# EAGLE board BOARD_e_BOOK_READER__VERSIUNE_10 v44 (EAGLE 9.7.0)
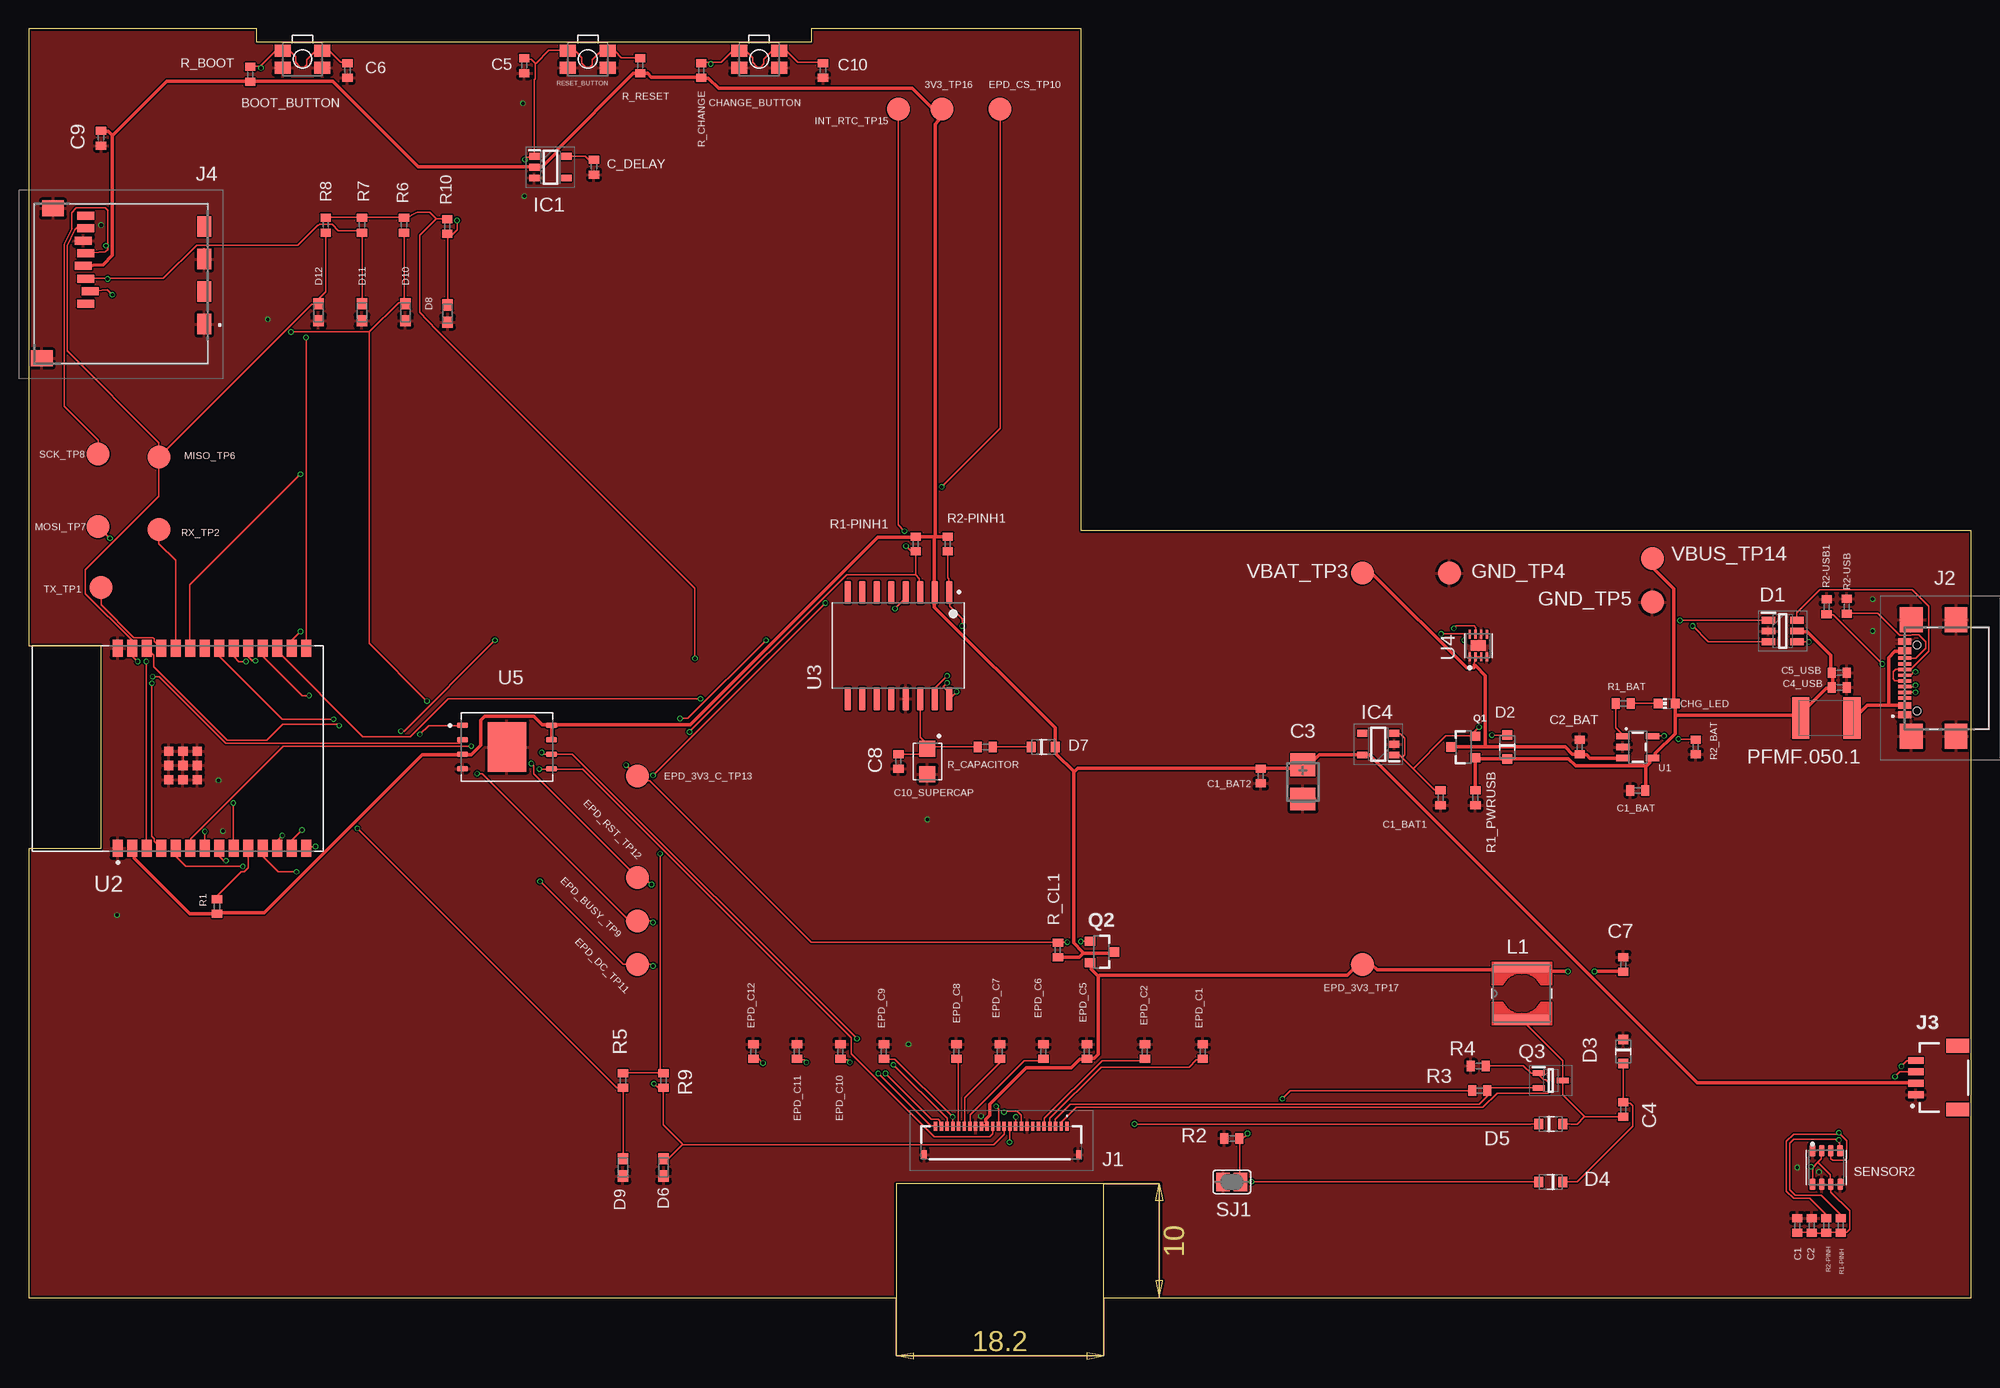
[diagram p0: board, top side]
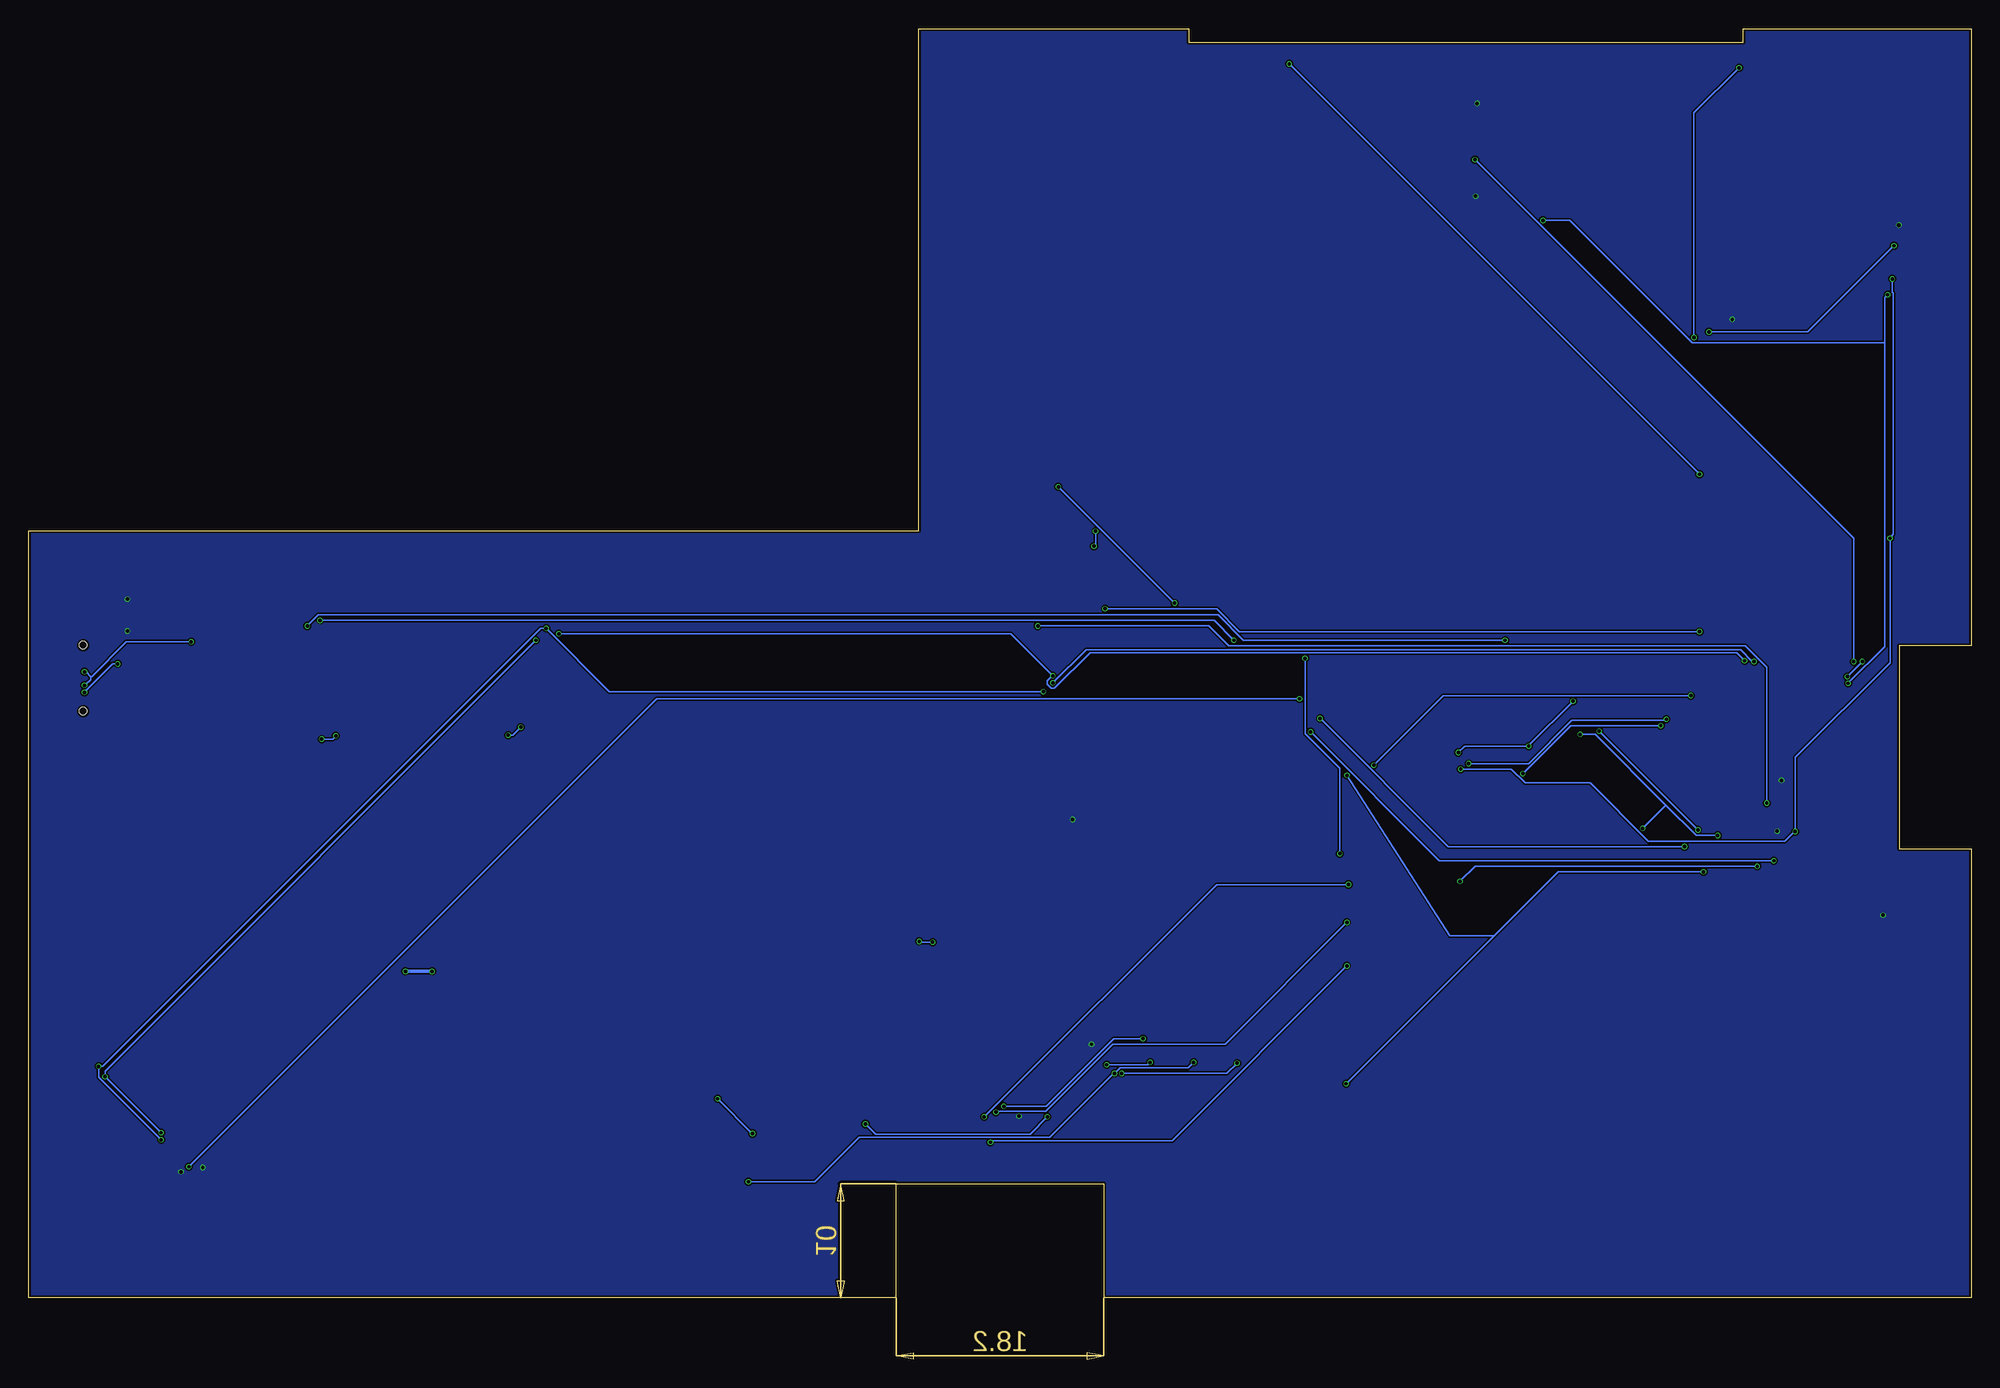
[diagram p1: board, bottom side, seen from below]

Size 170.2 x 111.2 mm. Coordinates in mm from the lower left corner, seen from the top.
Outline: 0,0 76,0 76,10 94.2,10 94.2,0 170.2,0 170.2,67.2 92.2,67.2 92.2,111.2 68.58,111.2 68.58,110 20,110 20,111.2 0,111.2 0,57.15 6.34,57.15 6.34,39.37 0,39.37 0,0
Copper layers (1*16): Top 0.035mm / dielectric 1.6mm / Bottom 0.035mm
Design rules "jlcpcb-2layers.dru": minimum track width 0.15mm, minimum drill 0.3mm, track to track 5mil, track to pad 5mil, pad to pad 5mil, via to via 5mil, smd to smd 5mil, copper to edge 0.2mm, drill to drill 5mil, minimum pad ring 10mil, minimum via ring 3mil, stop-mask expansion 4mil, vias tented up to drill 0mil, thermal gap 10mil
Net classes: 1 Trasee alimentare: width 0.3 mm

## Footprints (pad centres in the part's own frame; a part is rotated, then mirrored left to right if it is on the bottom)
TP20R = smd 2 x 2: TP 0,0
MYBUTTON = smd 1.4 x 1.05: 1 1.75,0.75; 2 -1.75,0.75; 3 -1.75,-0.75; 4 1.75,-0.75
ESP32_WROVER_EAGLE-LTSPICE_C0402 = smd 0.7 x 0.9: 1 -0.65,0; 2 0.65,0
RCL_CT3528 = smd 2 x 2.2: + -1.5,0; - 1.5,0
CAPCP3225X100N = smd 1.4 x 1.4: 1 -1.1,0; 2 1.1,0
ADAFRUIT_CHIP-LED0603 = smd 0.8 x 0.8: A 0,-0.75; C 0,0.75
SOT95P280X145-6N = smd 1.2 x 0.6: 1 -1.25,0.95; 2 -1.25,0; 3 -1.25,-0.95; 4 1.25,-0.95; 5 1.25,0; 6 1.25,0.95
ESP32_WROVER_AVX---SD0805S020S1R0_AVX_SD0805S020S1R0_0 = smd 0.8 x 0.9: 1 -1.05,0; 2 1.05,0
DIOC1608X36N = smd 0.97 x 0.94: 1 -0.75,0; 2 0.75,0
SOT95P280X125-5N = smd 0.9 x 0.6: 1 -1.4,0.95; 2 -1.4,0; 3 -1.4,-0.95; 4 1.4,-0.95; 5 1.4,0.95
SOT95P280X120-5N = smd 0.9 x 0.6: 1 -1.4,0.95; 2 -1.4,0; 3 -1.4,-0.95; 4 1.4,-0.95; 5 1.4,0.95
FH34SRJ24S05SH99 = smd 0.3 x 0.8: 1 5.75,1.45; 2 5.25,1.45; 3 4.75,1.45; 4 4.25,1.45; 5 3.75,1.45; 6 3.25,1.45; 7 2.75,1.45; 8 2.25,1.45; 9 1.75,1.45; 10 1.25,1.45; 11 0.75,1.45; 12 0.25,1.45; 13 -0.25,1.45; 14 -0.75,1.45; 15 -1.25,1.45; 16 -1.75,1.45; 17 -2.25,1.45; 18 -2.75,1.45; 19 -3.25,1.45; 20 -3.75,1.45; 21 -4.25,1.45; 22 -4.75,1.45; 23 -5.25,1.45; 24 -5.75,1.45 | smd 0.4 x 0.8: MP1 6.75,-1.05; MP2 -6.75,-1.05
SAMACSYS_PARTS_USB4110GFA = smd 0.3 x 1.15: A1 -3.35,3.678; A4 -2.55,3.678; A5 -1.25,3.678; A6 -0.25,3.678; A7 0.25,3.678; A8 1.25,3.678; A9 2.55,3.678; A12 3.35,3.678; B1 3.05,3.678; B4 2.25,3.678; B5 1.75,3.678; B6 0.75,3.678; B7 -0.75,3.678; B8 -1.75,3.678; B9 -2.25,3.678; B12 -3.05,3.678 | smd 2.18 x 2: MP1 -5.11,-0.827; MP2 5.11,-0.827; MP3 -5.11,3.103; MP4 5.11,3.103 | hole 0.65: -2.89,2.603; 2.89,2.603
JST04_1MM_RA = smd 0.6 x 1.35: 1 -1.5,0; 2 -0.5,0; 3 0.5,0; 4 1.5,0 | smd 1.2 x 2: NC1 2.8,-3.675; NC2 -2.8,-3.675
112ATAARR03ATTEND = smd 1.8 x 1.2: G1 10.6,10.4; G2 4.9,10.4; S1 7.75,10.4; S2 2.05,10.4 | smd 1.4 x 1.9: G3 13.6,-3.85; G4 0.45,-2.85 | smd 0.7 x 1.5: P1 8.8,0; P2 7.7,0.4; P3 6.6,0; P4 5.5,-0.2; P5 4.4,0; P6 3.3,-0.2; P7 2.2,0; P8 1.1,0
IND_4828-WE-TPC_WRE = smd 0.889 x 4.826: 1 -4.826,-2.54; 2 -0.254,-2.54
ESP32C6_VARISTOR_CT/CN1812 = smd 1.5 x 3.6: 1 -2.25,0; 2 2.25,0
ESP32_WROVER_SPARKFUN-DISCRETESEMI_SOT23-3 = smd 0.8 x 0.9: 1 -0.95,-1; 2 0.95,-1; 3 0,1.1
SOT65P210X110-3N = smd 1.05 x 0.5: 1 -1.05,0.65; 2 -1.05,-0.65; 3 1.05,0
ESP32_WROVER_EAGLE-LTSPICE_R0402 = smd 0.7 x 0.9: 1 -0.65,0; 2 0.65,0
ESP32_WROVER_BME680_PSON80P300X300X100-8N = smd 1.016 x 0.5: 1 1.458,1.2; 2 1.458,0.4; 3 1.458,-0.4; 4 1.458,-1.2; 5 -1.458,-1.22; 6 -1.458,-0.4; 7 -1.458,0.4; 8 -1.458,1.2
SJ = smd 1.168 x 1.6: 1 -0.762,0; 2 0.762,0
ESP32_WROVER_SPARKFUN-IC-POWER_SOT23-5 = smd 0.55 x 1.2: 1 -0.95,-1.3; 2 0,-1.3; 3 0.95,-1.3; 4 0.95,1.3; 5 -0.95,1.3
XCVR_ESP32-C6-WROOM-1-N8 = smd 1.5 x 0.9: 1 -8.75,5.26; 2 -8.75,3.99; 3 -8.75,2.72; 4 -8.75,1.45; 5 -8.75,0.18; 6 -8.75,-1.09; 7 -8.75,-2.36; 8 -8.75,-3.63; 9 -8.75,-4.9; 10 -8.75,-6.17; 11 -8.75,-7.44; 12 -8.75,-8.71; 13 -8.75,-9.98; 14 -8.75,-11.25; 15 8.75,-11.25; 16 8.75,-9.98; 17 8.75,-8.71; 18 8.75,-7.44; 19 8.75,-6.17; 20 8.75,-4.9; 21 8.75,-3.63; 22 8.75,-2.36; 23 8.75,-1.09; 24 8.75,0.18; 25 8.75,1.45; 26 8.75,2.72; 27 8.75,3.99; 28 8.75,5.26 | smd 0.8 x 0.8: 29_1 -2.755,0.79; 29_2 -1.505,0.79; 29_3 -0.255,0.79; 29_4 -2.755,-0.46; 29_5 -1.505,-0.46; 29_6 -0.255,-0.46; 29_7 -2.755,-1.71; 29_8 -1.505,-1.71; 29_9 -0.255,-1.71
SOIC127P1032X265-16N = smd 2.05 x 0.59: 1 -4.655,4.445; 2 -4.655,3.175; 3 -4.655,1.905; 4 -4.655,0.635; 5 -4.655,-0.635; 6 -4.655,-1.905; 7 -4.655,-3.175; 8 -4.655,-4.445; 9 4.655,-4.445; 10 4.655,-3.175; 11 4.655,-1.905; 12 4.655,-0.635; 13 4.655,0.635; 14 4.655,1.905; 15 4.655,3.175; 16 4.655,4.445
SON50P200X200X80-9N = smd 0.76 x 0.27: 1 -0.985,0.75; 2 -0.985,0.25; 3 -0.985,-0.25; 4 -0.985,-0.75; 5 0.985,-0.75; 6 0.985,-0.25; 7 0.985,0.25; 8 0.985,0.75 | smd 0.9 x 1.3: 9 0,0
SON127P600X800X80-9N = smd 0.94 x 0.44: 1 -3.895,1.905; 2 -3.895,0.635; 3 -3.895,-0.635; 4 -3.895,-1.905; 5 3.895,-1.905; 6 3.895,-0.635; 7 3.895,0.635; 8 3.895,1.905 | smd 3.4 x 4.3: 9 0,0

## Placement (x,y rotation side)
3V3_TP16  TPTP20R  [TP20R]  80.01,104.14 0 top
BOOT_BUTTON  BUTTON_CUSYOMV1  [MYBUTTON]  24,108.53 180 top
C1  100nF  [ESP32_WROVER_EAGLE-LTSPICE_C0402]  154.94,6.35 90 top
C1_BAT  4.7uF  [ESP32_WROVER_EAGLE-LTSPICE_C0402]  140.97,44.45 180 top
C1_BAT1  4.7uF  [ESP32_WROVER_EAGLE-LTSPICE_C0402]  123.7,43.81 270 top
C1_BAT2  4.7uF  [ESP32_WROVER_EAGLE-LTSPICE_C0402]  107.95,45.72 270 top
C2  100nF  [ESP32_WROVER_EAGLE-LTSPICE_C0402]  156.21,6.35 90 top
C2_BAT  4.7uF  [ESP32_WROVER_EAGLE-LTSPICE_C0402]  135.89,48.26 90 top
C3  100uF  [RCL_CT3528]  111.63,45.21 270 top
C4  4.7uF/25V  [ESP32_WROVER_EAGLE-LTSPICE_C0402]  139.7,16.51 270 top
C4_USB  100nF  [ESP32_WROVER_EAGLE-LTSPICE_C0402]  158.62,53.48 0 top
C5  1uF  [ESP32_WROVER_EAGLE-LTSPICE_C0402]  43.43,107.95 270 top
C5_USB  4.7uF  [ESP32_WROVER_EAGLE-LTSPICE_C0402]  158.62,54.76 0 top
C6  100nF  [ESP32_WROVER_EAGLE-LTSPICE_C0402]  27.94,107.53 270 top
C7  10uF  [ESP32_WROVER_EAGLE-LTSPICE_C0402]  139.7,29.21 90 top
C8  100nF  [ESP32_WROVER_EAGLE-LTSPICE_C0402]  76.2,46.99 270 top
C9  100nF  [ESP32_WROVER_EAGLE-LTSPICE_C0402]  6.35,101.6 270 top
C10  100nF  [ESP32_WROVER_EAGLE-LTSPICE_C0402]  69.6,107.53 270 top
C10_SUPERCAP  CPH3225A  [CAPCP3225X100N]  78.74,46.99 270 top
C_DELAY  100nF  [ESP32_WROVER_EAGLE-LTSPICE_C0402]  49.53,99.06 270 top
CHANGE_BUTTON  BUTTON_CUSYOMV1  [MYBUTTON]  64,108.53 180 top
CHG_LED  [ADAFRUIT_CHIP-LED0603]  143.51,52.07 90 top
D1  USBLC6-2SC6Y  [SOT95P280X145-6N]  153.67,58.42 0 top
D2  ESP32_WROVER_AVX---SD0805S020S1R0_AVX_SD0805S020S1R0_0_0AVX_SD0805S020S1R0_0_0  [ESP32_WROVER_AVX---SD0805S020S1R0_AVX_SD0805S020S1R0_0]  129.54,48.26 270 top
D3  MBR0530  [ESP32_WROVER_AVX---SD0805S020S1R0_AVX_SD0805S020S1R0_0]  139.7,21.59 270 top
D4  MBR0530  [ESP32_WROVER_AVX---SD0805S020S1R0_AVX_SD0805S020S1R0_0]  133.35,10.16 180 top
D5  MBR0530  [ESP32_WROVER_AVX---SD0805S020S1R0_AVX_SD0805S020S1R0_0]  133.35,15.24 0 top
D6  PGB1010603MR  [DIOC1608X36N]  55.63,11.43 90 top
D7  ESP32_WROVER_AVX---SD0805S020S1R0_AVX_SD0805S020S1R0_0_0AVX_SD0805S020S1R0_0_0  [ESP32_WROVER_AVX---SD0805S020S1R0_AVX_SD0805S020S1R0_0]  88.9,48.26 0 top
D8  PGB1010603MR  [DIOC1608X36N]  36.7,86.23 90 top
D9  PGB1010603MR  [DIOC1608X36N]  52.07,11.43 90 top
D10  PGB1010603MR  [DIOC1608X36N]  33.02,86.36 90 top
D11  PGB1010603MR  [DIOC1608X36N]  29.21,86.36 90 top
D12  PGB1010603MR  [DIOC1608X36N]  25.4,86.36 90 top
EPD_3V3_C_TP13  TPTP20R  [TP20R]  53.34,45.72 0 top
EPD_3V3_TP17  TPTP20R  [TP20R]  116.84,29.21 0 top
EPD_BUSY_TP9  TPTP20R  [TP20R]  53.34,33.02 0 top
EPD_C1  1uF/50V  [ESP32_WROVER_EAGLE-LTSPICE_C0402]  102.87,21.59 90 top
EPD_C2  1uF/50V  [ESP32_WROVER_EAGLE-LTSPICE_C0402]  97.79,21.59 90 top
EPD_C5  0.1uF/50V  [ESP32_WROVER_EAGLE-LTSPICE_C0402]  92.71,21.59 90 top
EPD_C6  1uF/50V  [ESP32_WROVER_EAGLE-LTSPICE_C0402]  88.9,21.59 90 top
EPD_C7  1uF/50V  [ESP32_WROVER_EAGLE-LTSPICE_C0402]  85.09,21.59 90 top
EPD_C8  1uF/50V  [ESP32_WROVER_EAGLE-LTSPICE_C0402]  81.28,21.59 90 top
EPD_C9  1uF/50V  [ESP32_WROVER_EAGLE-LTSPICE_C0402]  74.93,21.59 90 top
EPD_C10  1uF/50V  [ESP32_WROVER_EAGLE-LTSPICE_C0402]  71.12,21.59 90 top
EPD_C11  1uF/50V  [ESP32_WROVER_EAGLE-LTSPICE_C0402]  67.31,21.59 90 top
EPD_C12  1uF/50V  [ESP32_WROVER_EAGLE-LTSPICE_C0402]  63.5,21.59 90 top
EPD_CS_TP10  TPTP20R  [TP20R]  85.09,104.14 0 top
EPD_DC_TP11  TPTP20R  [TP20R]  53.34,29.21 0 top
EPD_RST_TP12  TPTP20R  [TP20R]  53.34,36.83 0 top
GND_TP4  TPTP20R  [TP20R]  124.46,63.5 0 top
GND_TP5  TPTP20R  [TP20R]  142.24,60.96 0 top
IC1  BD5229G-TR  [SOT95P280X125-5N]  45.72,99.06 0 top
IC4  XC6220A331MR-G  [SOT95P280X120-5N]  118.24,48.51 180 top
INT_RTC_TP15  TPTP20R  [TP20R]  76.2,104.14 0 top
J1  FH34SRJ-24S-0.5SH_99_  [FH34SRJ24S05SH99]  85.22,13.59 0 top
J2  SAMACSYS_PARTS_USB4110-GF-A  [SAMACSYS_PARTS_USB4110GFA]  168.02,54.3 90 top
J3  QWIIC_RIGHT_ANGLE  [JST04_1MM_RA]  165.32,19.3 90 top
J4  112A-TAAR-R03_ATTEND  [112ATAARR03ATTEND]  5,95.9 270 top
L1  68uH  [IND_4828-WE-TPC_WRE]  128.27,29.21 90 top
MISO_TP6  TPTP20R  [TP20R]  11.43,73.66 0 top
MOSI_TP7  TPTP20R  [TP20R]  6.1,67.56 0 top
PFMF.050.1  ESP32C6_VARISTORCN1812  [ESP32C6_VARISTOR_CT/CN1812]  157.48,50.8 180 top
Q1  20V/4.2A/52mΩ/1.4W  [ESP32_WROVER_SPARKFUN-DISCRETESEMI_SOT23-3]  125.73,48.26 90 top
Q2  20V/4.2A/52mΩ/1.4W  [ESP32_WROVER_SPARKFUN-DISCRETESEMI_SOT23-3]  93.98,30.31 270 top
Q3  SI1308EDL-T1-GE3  [SOT65P210X110-3N]  133.35,19.05 0 top
R1  10K  [ESP32_WROVER_EAGLE-LTSPICE_R0402]  16.51,34.29 90 top
R1-PINH  10K  [ESP32_WROVER_EAGLE-LTSPICE_R0402]  157.48,6.35 270 top
R1-PINH1  10K  [ESP32_WROVER_EAGLE-LTSPICE_R0402]  77.72,66.04 90 top
R1_BAT  200  [ESP32_WROVER_EAGLE-LTSPICE_R0402]  139.7,52.07 0 top
R1_PWRUSB  100K  [ESP32_WROVER_EAGLE-LTSPICE_R0402]  126.75,43.81 90 top
R2  2.2  [ESP32_WROVER_EAGLE-LTSPICE_R0402]  105.41,13.97 0 top
R2-PINH  10K  [ESP32_WROVER_EAGLE-LTSPICE_R0402]  158.75,6.35 270 top
R2-PINH1  10K  [ESP32_WROVER_EAGLE-LTSPICE_R0402]  80.52,66.04 90 top
R2-USB  5K1  [ESP32_WROVER_EAGLE-LTSPICE_R0402]  159.27,60.58 90 top
R2-USB1  5k1  [ESP32_WROVER_EAGLE-LTSPICE_R0402]  157.51,60.55 269.8 top
R2_BAT  2K  [ESP32_WROVER_EAGLE-LTSPICE_R0402]  146.05,48.26 90 top
R3  0.47  [ESP32_WROVER_EAGLE-LTSPICE_R0402]  127.13,18.16 180 top
R4  10K  [ESP32_WROVER_EAGLE-LTSPICE_R0402]  127,20.32 180 top
R5  10K  [ESP32_WROVER_EAGLE-LTSPICE_R0402]  52.07,19.05 90 top
R6  10K  [ESP32_WROVER_EAGLE-LTSPICE_R0402]  32.89,93.98 90 top
R7  10K  [ESP32_WROVER_EAGLE-LTSPICE_R0402]  29.21,93.98 90 top
R8  10K  [ESP32_WROVER_EAGLE-LTSPICE_R0402]  26.04,93.98 90 top
R9  10K  [ESP32_WROVER_EAGLE-LTSPICE_R0402]  55.63,19.05 90 top
R10  10K  [ESP32_WROVER_EAGLE-LTSPICE_R0402]  36.69,93.85 90 top
R_BOOT  10K  [ESP32_WROVER_EAGLE-LTSPICE_R0402]  19.43,107.19 90 top
R_CAPACITOR  15  [ESP32_WROVER_EAGLE-LTSPICE_R0402]  83.82,48.26 180 top
R_CHANGE  10K  [ESP32_WROVER_EAGLE-LTSPICE_R0402]  58.93,107.53 90 top
R_CL1  10k  [ESP32_WROVER_EAGLE-LTSPICE_R0402]  90.17,30.48 90 top
R_RESET  10K  [ESP32_WROVER_EAGLE-LTSPICE_R0402]  53.59,107.95 90 top
RESET_BUTTON  BUTTON_CUSYOMV1  [MYBUTTON]  49,108.53 180 top
RX_TP2  TPTP20R  [TP20R]  11.43,67.31 0 top
SCK_TP8  TPTP20R  [TP20R]  6.1,73.91 0 top
SENSOR2  ESP32_WROVER_BME680_BME680  [ESP32_WROVER_BME680_PSON80P300X300X100-8N]  157.48,11.43 90 top
SJ1  [SJ]  105.41,10.16 0 top
TX_TP1  TPTP20R  [TP20R]  6.35,62.23 0 top
U1  ESP32_WROVER_SPARKFUN-IC-POWER_MCP73831  [ESP32_WROVER_SPARKFUN-IC-POWER_SOT23-5]  140.97,48.26 270 top
U2  ESP32-C6-WROOM-1-N8  [XCVR_ESP32-C6-WROOM-1-N8]  13.07,48.15 90 top
U3  DS3231SN#  [SOIC127P1032X265-16N]  76.2,57.15 270 top
U4  MAX17048G+T10  [SON50P200X200X80-9N]  127,57.15 90 top
U5  W25Q512JVEIQ  [SON127P600X800X80-9N]  41.91,48.26 0 top
VBAT_TP3  TPTP20R  [TP20R]  116.84,63.5 0 top
VBUS_TP14  TPTP20R  [TP20R]  142.24,64.77 0 top

## Library data of the parts
3V3_TP16 BOOT_BUTTON CHANGE_BUTTON CHG_LED EPD_3V3_C_TP13 EPD_3V3_TP17 EPD_BUSY_TP9 EPD_CS_TP10 EPD_DC_TP11 EPD_RST_TP12 GND_TP4 GND_TP5 INT_RTC_TP15 MISO_TP6 MOSI_TP7 PFMF.050.1 RESET_BUTTON RX_TP2 SCK_TP8 SJ1 TX_TP1 VBAT_TP3 VBUS_TP14 = DeskAssistant v19 v1
C1 C1_BAT C1_BAT1 C1_BAT2 C2 C2_BAT C4 C4_USB C5 C5_USB C6-C10 C_DELAY EPD_C1 EPD_C2 EPD_C5-EPD_C12 = DeskAssistant v19 v1; SPICEMODEL: NONE; SPICEPREFIX: C
C3 = DeskAssistant v19 v1; SPICEPREFIX: C
C10_SUPERCAP = DeskAssistant v19 v1; AVAILABILITY: Not in stock; CHECK_PRICES: https://www.snapeda.com/parts/CPH3225A/Seiko+Instruments/view-part/?ref=eda; DESCRIPTION: 11 mF (EDLC) Supercapacitor 3.3 V 1210 (3225 Metric) - -; MF: Seiko Instruments; MP: CPH3225A; PACKAGE: 1210 Seiko; PRICE: None; PURCHASE-URL: https://www.snapeda.com/api/url_track_click_mouser/?unipart_id=562593&manufacturer=Seiko Instruments&part_name=CPH3225A&search_term=None; SNAPEDA_LINK: https://www.snapeda.com/parts/CPH3225A/Seiko+Instruments/view-part/?ref=snap
D1 = DeskAssistant v19 v1; AVAILABILITY: In Stock; CHECK_PRICES: https://www.snapeda.com/parts/USBLC6-2SC6Y/STMicroelectronics/view-part/?ref=eda; DESCRIPTION: 17V Clamp 5A (8/20µs) Ipp Tvs Diode Surface Mount SOT-23-6; MF: STMicroelectronics; MP: USBLC6-2SC6Y; PACKAGE: SOT-23-6 STMicroelectronics; PRICE: None; SNAPEDA_LINK: https://www.snapeda.com/parts/USBLC6-2SC6Y/STMicroelectronics/view-part/?ref=snap
D2 D7 = DeskAssistant v19 v1; CENTROID_NOT_SPECIFIED: No; DATASHEET: http://datasheets.avx.com/schottky.pdf; DIGIKEY_DESCRIPTION: DIODE SCHOTTKY 20V 1A 0805; DIGIKEY_PART_NUMBER: 478-7800-1-ND; LEAD_FREE: yes; MF: AVX; MOUSER_PART_NUMBER: 581-SD0805S020S1R0; PACKAGE: 0805 (2012 metric); PREFIX: D; ROHS: yes; TEMPERATURE_RANGE_HIGH: +125°C; TEMPERATURE_RANGE_LOW: -55°C
D3-D5 = DeskAssistant v19 v1; AVAILABILITY: In Stock; CHECK_PRICES: https://www.snapeda.com/parts/MBR0530/Onsemi/view-part/?ref=eda; DESCRIPTION: Diode Schottky 30 V 500mA Surface Mount SOD-123; MF: ON Semiconductor; MP: MBR0530; PACKAGE: SOD-123-2 ON Semiconductor; PRICE: None; PURCHASE-URL: https://www.snapeda.com/api/url_track_click_mouser/?unipart_id=179458&manufacturer=ON Semiconductor&part_name=MBR0530&search_term=None; SNAPEDA_LINK: https://www.snapeda.com/parts/MBR0530/Onsemi/view-part/?ref=snap
D6 D8-D12 = DeskAssistant v19 v1; AVAILABILITY: In Stock; CHECK_PRICES: https://www.snapeda.com/parts/PGB1010603MR/Littelfuse/view-part/?ref=eda; DESCRIPTION: 150V (Typ) Clamp - Ipp Tvs Diode Surface Mount 0603 (1608 Metric); MF: Littelfuse Inc.; MP: PGB1010603MR; PACKAGE: 0603 Littelfuse Inc.; PRICE: None; PURCHASE-URL: https://www.snapeda.com/api/url_track_click_mouser/?unipart_id=5659453&manufacturer=Littelfuse Inc.&part_name=PGB1010603MR&search_term=None; SNAPEDA_LINK: https://www.snapeda.com/parts/PGB1010603MR/Littelfuse/view-part/?ref=snap
IC1 = DeskAssistant v19 v1; DESCRIPTION: Voltage Detector with Adjustable Delay Time: CMOS processes are utilized to develop high precision, low current consumption CMOS reset ICs that allow arbitrary setting of the delay time. The extensive lineup includes both Nch Open Drain and CMOS output types in a wide range of detection voltages (from 2.3V to 6.0V, in 0.1V steps), enabling selection of the ideal solution based on customer requirements. In addition, the entire series is of course both lead-free and RoHS-compliant.; HEIGHT: 1.25mm; MANUFACTURER_NAME: ROHM Semiconductor; MANUFACTURER_PART_NUMBER: BD5229G-TR; MOUSER_PART_NUMBER: 755-BD5229G-TR; MOUSER_PRICE-STOCK: https://www.mouser.co.uk/ProductDetail/ROHM-Semiconductor/BD5229G-TR?qs=4kLU8WoGk0vvnhrrYwdszw%3D%3D
IC4 = DeskAssistant v19 v1; DESCRIPTION: LDO Voltage Regulators; HEIGHT: 1.2mm; MANUFACTURER_NAME: Torex; MANUFACTURER_PART_NUMBER: XC6220A331MR-G; MOUSER_PART_NUMBER: 865-XC6220A331MR-G; MOUSER_PRICE-STOCK: https://www.mouser.co.uk/ProductDetail/Torex-Semiconductor/XC6220A331MR-G?qs=AsjdqWjXhJ8ZSWznL1J0gg%3D%3D
J1 = DeskAssistant v19 v1; DESCRIPTION: 24 Position FFC, FPC Connector Contacts, Top and Bottom 0.020" (0.50mm) Surface Mount, Right Angle; HEIGHT: 1.1mm; MANUFACTURER_NAME: Hirose; MANUFACTURER_PART_NUMBER: FH34SRJ-24S-0.5SH(99); MOUSER_PART_NUMBER: 798-FH34SRJ24S05SH99; MOUSER_PRICE-STOCK: https://www.mouser.co.uk/ProductDetail/Hirose-Connector/FH34SRJ-24S-0.5SH99?qs=vcbW%252B4%252BSTIpKBl5ap9J8Fw%3D%3D
J2 = DeskAssistant v19 v1; DESCRIPTION: CONN USB 2.0 TYPE-C R/A SMT; HEIGHT: 3.26mm; MANUFACTURER_NAME: GCT (GLOBAL CONNECTOR TECHNOLOGY); MANUFACTURER_PART_NUMBER: USB4110-GF-A; MOUSER_PART_NUMBER: 640-USB4110-GF-A; MOUSER_PRICE-STOCK: https://www.mouser.co.uk/ProductDetail/GCT/USB4110-GF-A?qs=KUoIvG%2F9IlYiZvIXQjyJeA%3D%3D
J3 = DeskAssistant v19 v1; PROD_ID: CONN-13694
J4 = DeskAssistant v19 v1; DESCRIPTION: Micro SD Card Socket, Push-Push Type, Top Mount, SMT, H=1.83mm, 10u; HEIGHT: 1.9mm; MANUFACTURER_NAME: ATTEND; MANUFACTURER_PART_NUMBER: 112A-TAAR-R03 ATTEND
L1 = DeskAssistant v19 v1; COPYRIGHT: Copyright (C) 2024 Ultra Librarian. All rights reserved.; MANUFACTURER_PART_NUMBER: 744043680; MFR_NAME: Wurth Electronics
Q1 Q2 = DeskAssistant v19 v1; PROD_ID: TRAN-14388
Q3 = DeskAssistant v19 v1; AVAILABILITY: In Stock; CHECK_PRICES: https://www.snapeda.com/parts/SI1308EDL-T1-GE3/Vishay+Siliconix/view-part/?ref=eda; DESCRIPTION: Si1308EDL-T1-GE3 N-channel MOSFET Transistor, 1.5 A, 30 V, 3-Pin SC-70 | Siliconix / Vishay SI1308EDL-T1-GE3; MF: Vishay Siliconix; MP: SI1308EDL-T1-GE3; PACKAGE: SOT-323 Vishay Semiconductor; PRICE: None; PURCHASE-URL: https://www.snapeda.com/api/url_track_click_mouser/?unipart_id=274603&manufacturer=Vishay Siliconix&part_name=SI1308EDL-T1-GE3&search_term=None; SNAPEDA_LINK: https://www.snapeda.com/parts/SI1308EDL-T1-GE3/Vishay+Siliconix/view-part/?ref=snap
R1 R1-PINH R1-PINH1 R1_BAT R1_PWRUSB R2 R2-PINH R2-PINH1 R2-USB R2-USB1 R2_BAT R3-R10 R_BOOT R_CAPACITOR R_CHANGE R_CL1 R_RESET = DeskAssistant v19 v1; SPICEMODEL: NONE; SPICEPREFIX: R
SENSOR2 = DeskAssistant v19 v1; AVAILABILITY: Unavailable; DESCRIPTION: Integrated Environmental Unit; MF: Bosch Sensortec; MP: BME680; PACKAGE: LGA-8 Bosch Tools; PRICE: None
U1 = DeskAssistant v19 v1; PROD_ID: IC-09995
U2 = DeskAssistant v19 v1; AVAILABILITY: In Stock; CHECK_PRICES: https://www.snapeda.com/parts/ESP32-C6-WROOM-1-N8/Espressif+Systems/view-part/?ref=eda; DESCRIPTION: Multiprotocol Modules ESP32-C6 module, Wi-Fi 6 in 2.4 GHz band, Bluetooth 5, Zigbee 3.0 and Thread. ESP34-WROOM Compatible - ENGINEERING SAMPLE; MF: Espressif Systems; MP: ESP32-C6-WROOM-1-N8; PACKAGE: None; PRICE: None; SNAPEDA_LINK: https://www.snapeda.com/parts/ESP32-C6-WROOM-1-N8/Espressif+Systems/view-part/?ref=snap
U3 = DeskAssistant v19 v1; AVAILABILITY: In Stock; CHECK_PRICES: https://www.snapeda.com/parts/DS3231SN%23/Analog+Devices/view-part/?ref=eda; DESCRIPTION: Extremely Accurate I²C-Integrated RTC/TCXO/Crystal; MF: Analog Devices; MP: DS3231SN#; PACKAGE: SOIC-16 Maxim; PRICE: None; PURCHASE-URL: https://www.snapeda.com/api/url_track_click_mouser/?unipart_id=99048&manufacturer=Analog Devices&part_name=DS3231SN#&search_term=None; SNAPEDA_LINK: https://www.snapeda.com/parts/DS3231SN%23/Analog+Devices/view-part/?ref=snap
U4 = DeskAssistant v19 v1; AVAILABILITY: In Stock; CHECK_PRICES: https://www.snapeda.com/parts/MAX17048G+T10/Analog+Devices/view-part/?ref=eda; DESCRIPTION: 3µA 1-Cell/2-Cell Fuel Gauge with ModelGauge; MF: Analog Devices; MP: MAX17048G+T10; PACKAGE: TDFN-8 Maxim; PRICE: None; PURCHASE-URL: https://www.snapeda.com/api/url_track_click_mouser/?unipart_id=329239&manufacturer=Analog Devices&part_name=MAX17048G+T10&search_term=None; SNAPEDA_LINK: https://www.snapeda.com/parts/MAX17048G+T10/Analog+Devices/view-part/?ref=snap
U5 = DeskAssistant v19 v1; AVAILABILITY: In Stock; CHECK_PRICES: https://www.snapeda.com/parts/W25Q512JVEIQ/Winbond+Electronics/view-part/?ref=eda; DESCRIPTION: FLASH - NOR Memory IC 512Mb (64M x 8) SPI - Quad I/O 133 MHz 8-WSON (8x6); MF: Winbond Electronics; MP: W25Q512JVEIQ; PACKAGE: Package; PRICE: None; SNAPEDA_LINK: https://www.snapeda.com/parts/W25Q512JVEIQ/Winbond+Electronics/view-part/?ref=snap

## Nets
3V3 [Trasee alimentare]: 3V3_TP16.TP C1_BAT2.1 C3.+ C9.1 D7.2 IC1.2 IC4.5 J3.2 J4.P4 Q2.3 R1-PINH1.2 R1.1 R2-PINH1.2 R_BOOT.1 R_CHANGE.1 R_CL1.1 R_RESET.1 U2.2 U3.2 U5.3 U5.7 U5.8
32KHZ: R2-PINH1.1 U2.9 U3.1
DN: D1.4 J2.A7 J2.B7
DP: D1.6 J2.A6 J2.B6
EPD_3V3 [Trasee alimentare]: C7.1 EPD_3V3_TP17.TP EPD_C5.1 J1.15 J1.16 L1.2 Q2.2
EPD_3V3_C: EPD_3V3_C_TP13.TP Q2.1 R_CL1.2 U2.18
EPD_BUSY: EPD_BUSY_TP9.TP J1.9 U2.26
EPD_CS: D6.2 EPD_CS_TP10.TP J1.12 R9.1 U2.11
EPD_DC: EPD_DC_TP11.TP J1.11 U2.5
EPD_RST: EPD_RST_TP12.TP J1.10 U2.21
FLASH_CS: D9.2 R5.1 U2.12 U5.1
GDR: J1.2 Q3.1 R4.1
GND: BOOT_BUTTON.1 BOOT_BUTTON.2 C1.2 C1_BAT1.2 C1_BAT2.2 C1_BAT.2 C2.2 C2_BAT.2 C3.- C4_USB.2 C5.2 C5_USB.2 C6.2 C7.2 C8.2 C9.2 C10.2 C10_SUPERCAP.2 C_DELAY.2 CHANGE_BUTTON.1 CHANGE_BUTTON.2 D1.2 D3.1 D6.1 D8.1 D9.1 D10.1 D11.1 D12.1 EPD_C1.2 EPD_C2.2 EPD_C5.2 EPD_C6.2 EPD_C7.2 EPD_C8.2 EPD_C9.2 EPD_C10.2 EPD_C11.2 EPD_C12.2 GND_TP4.TP GND_TP5.TP IC1.3 IC4.2 J1.8 J1.17 J1.MP1 J1.MP2 J2.A1 J2.A12 J2.B1 J2.B12 J2.MP1 J2.MP2 J2.MP3 J2.MP4 J3.1 J4.G1 J4.G2 J4.G3 J4.G4 J4.P6 R1_PWRUSB.1 R2-USB1.1 R2-USB.2 R2.1 R2_BAT.1 R4.2 RESET_BUTTON.1 RESET_BUTTON.2 SENSOR2.1 SENSOR2.5 SENSOR2.7 SJ1.1 U1.2 U2.1 U2.28 U2.29_1 U2.29_2 U2.29_3 U2.29_4 U2.29_5 U2.29_6 U2.29_7 U2.29_8 U2.29_9 U3.13 U4.1 U4.4 U4.6 U4.9 U5.4 U5.9
GPIO8: R1.2 U2.10
I2C_PW: C1.1 C2.1 R1-PINH.2 R2-PINH.2 SENSOR2.2 SENSOR2.6 SENSOR2.8 U2.17
INT_RTC: INT_RTC_TP15.TP R1-PINH1.1 U2.8 U3.3
IO/BOOT: BOOT_BUTTON.3 BOOT_BUTTON.4 C6.1 R_BOOT.2 U2.15
IO/CHANGE: C10.1 CHANGE_BUTTON.3 CHANGE_BUTTON.4 R_CHANGE.2 U2.23
MISO: D12.2 J4.P7 MISO_TP6.TP R8.1 U2.27 U5.2
MOSI: D11.2 J1.14 J4.P3 MOSI_TP7.TP R7.1 U2.7 U5.5
N$1: C1_BAT1.1 D2.1 IC4.1 IC4.3 Q1.2
N$2: J2.A5 R2-USB1.2
N$3: R5.2 R6.2 R7.2 R8.2 R9.2 R10.2
N$5: R1_BAT.1 U1.1
N$6: C4.1 D3.2 D4.1
N$7: CHG_LED.C R1_BAT.2
N$8: D7.1 R_CAPACITOR.1
N$9: J2.B5 R2-USB.1
N$10: C_DELAY.1 IC1.5
N$11: EPD_C12.1 J1.24
N$12: R2_BAT.2 U1.5
N$13: EPD_C8.1 J1.20
N$14: EPD_C10.1 J1.22
N$15: EPD_C7.1 J1.19
N$16: EPD_C6.1 J1.18
N$17: EPD_C1.1 J1.4
N$18: EPD_C2.1 J1.5
PREVGH: D5.1 EPD_C9.1 J1.21
PREVGL: D4.2 EPD_C11.1 J1.23
RESE: J1.3 Q3.2 R3.1
RESE': R2.2 R3.2 SJ1.2
RESET: C5.1 IC1.1 R_RESET.2 RESET_BUTTON.3 RESET_BUTTON.4 U2.3
RTC_RST: U2.16 U3.4
RX: RX_TP2.TP U2.24
SCK: D10.2 J1.13 J4.P5 R6.1 SCK_TP8.TP U2.6 U5.6
SCL: J3.4 R2-PINH.1 SENSOR2.4 U2.20 U3.16 U4.7
SDA: J3.3 R1-PINH.1 SENSOR2.3 U2.19 U3.15 U4.8
SRC: C4.2 D5.2 L1.1 Q3.3
SS_SD: D8.2 J4.P2 R10.1 U2.4
TX: TX_TP1.TP U2.25
USB_D+: D1.1 U2.14
USB_D-: D1.3 U2.13
VBAT [Trasee alimentare]: C2_BAT.1 Q1.3 U1.3 U4.2 U4.3 VBAT_TP3.TP
VBUS [Trasee alimentare]: C1_BAT.1 C4_USB.1 C5_USB.1 CHG_LED.A D1.5 D2.2 PFMF.050.1.2 Q1.1 R1_PWRUSB.2 U1.4 VBUS_TP14.TP
VRTC: C8.1 C10_SUPERCAP.1 R_CAPACITOR.2 U3.14
VUSB [Trasee alimentare]: J2.A4 J2.A9 J2.B4 J2.B9 PFMF.050.1.1

## Tracks (layer width: path | path; a pad name or v marks a point on that pad's centre or on a via)
3V3
  Top 0.3: 7.34,101.87 6.99,102.21 6.37,102.21 C9.1 | 7.34,101.87 7.34,91.34 6.53,90.53 J4.P4 | 7.34,101.87 7.48,101.94 12.12,106.58 19.39,106.58 R_BOOT.1 19.53,106.58 26.66,106.58 34.14,99.1 44.18,99.1 IC1.2 44.32,99.1 45.01,99.1 46.26,100.34 46.26,100.55 52.98,107.27 53.53,107.27 R_RESET.1 53.74,107.27 54.22,107.27 54.57,106.92 58.86,106.92 R_CHANGE.1 59.07,106.85 59.55,106.85 60.45,105.95 77.42,105.95 79.22,104.15 79.98,104.15 3V3_TP16.TP 79.71,104.01 79.71,103.11 79.43,102.84 79.43,66.69 | J3.2 165.3,18.84 146.19,18.84 117.45,47.58 116.96,47.58 IC4.5 116.83,47.58 113.08,47.58 112.25,46.74 111.77,46.74 C3.+ 111.63,46.67 111.35,46.4 107.96,46.4 C1_BAT2.1 107.82,46.4 91.89,46.4 91.69,46.19 91.55,46.12 | U5.8 45.77,50.21 45.01,50.21 44.25,50.97 39.96,50.97 39.61,50.62 39.61,48.41 38.78,47.58 38.5,47.58 38.43,47.64 38.02,47.64 U5.3 37.88,47.64 37.6,47.64 37.53,47.58 34.49,47.58 20.64,33.73 16.62,33.73 R1.1 16.48,33.66 14.13,33.66 9.28,38.5 9.28,39.2 9.14,39.33 U2.2 | U5.7 45.84,48.96 45.84,50.07 U5.8 | 92.38,30.19 92.03,29.85 90.23,29.85 R_CL1.1 | 92.38,30.19 94.94,30.19 95.01,30.26 Q2.3 | 79.43,66.69 80.47,66.69 R2-PINH1.2 | 79.43,66.69 79.36,66.69 | 79.36,66.69 77.77,66.69 R1-PINH1.2 77.63,66.62 74.37,66.62 57.96,50.21 46.33,50.21 46.26,50.14 45.98,50.14 U5.8 | 79.36,66.69 79.36,61.91 U3.2 79.36,61.77 79.36,60.52 89.96,49.93 D7.2 90.03,48.13 90.03,47.64 91.55,46.12 | 91.55,46.12 91.55,31.09 92.31,30.33 92.38,30.19
32KHZ  (via drill 0.3)
  Top 0.15: R2-PINH1.1 80.54,65.37 80.54,63.09 80.61,63.02 80.61,61.84 U3.1 80.68,61.77 80.68,60.59 81.78,59.49 v81.78,58.86 | v17.94,43.35 17.94,39.43 U2.9
  Bottom 0.15: v17.94,43.35 17.94,55.26 19.8,57.13 65.07,57.13 66.8,58.86 v81.78,58.86
DN  (via drill 0.3)
  Top 0.15: v165.3,53.67 165.16,53.53 164.4,53.53 J2.B7 | v165.3,54.85 165.16,54.85 164.88,54.57 164.4,54.57 J2.A7 | v155.95,57.48 154.98,57.48 D1.4
  Bottom 0.15: v165.3,53.67 165.02,53.95 164.95,53.95 164.75,54.15 164.75,54.43 | 164.75,54.43 165.16,54.85 v165.3,54.85 | v155.95,57.48 161.63,57.48 164.68,54.43 164.75,54.43
DP
  Top 0.15: J2.A6 164.33,54.08 163.5,54.08 163.36,54.22 163.36,54.85 163.57,55.05 J2.B6 164.4,55.05 164.88,55.05 166.48,56.65 166.48,60.59 165.02,62.05 156.92,62.05 154.91,60.04 154.91,59.42 D1.6
EPD_3V3  (via drill 0.3)
  Top 0.3: J1.16 83.52,15.1 83.93,15.1 J1.15 83.93,15.23 83.93,15.37 83.86,15.44 83.86,15.65 84.21,16 84.21,16.97 87.39,20.15 91.34,20.15 92.1,20.91 92.59,20.91 EPD_C5.1 92.73,20.98 93.35,20.98 93.69,21.33 93.69,28.18 | 93.69,28.18 93.07,28.81 93.07,29.22 93,29.29 Q2.2 | v137.18,28.6 139.68,28.6 C7.1 | v134.85,28.6 131.16,28.6 130.81,28.95 L1.2 130.68,28.88 130.54,28.74 118.14,28.74 117.72,29.15 116.89,29.15 EPD_3V3_TP17.TP 116.75,29.09 116.34,29.09 115.51,28.25 93.83,28.25 93.69,28.18
  Bottom 0.3: v134.85,28.6 v137.18,28.6
EPD_3V3_C  (via drill 0.3)
  Top 0.15: v91,31.16 90.23,31.16 R_CL1.2 90.16,31.16 68.56,31.16 54.43,45.29 53.81,45.29 53.39,45.7 EPD_3V3_C_TP13.TP 53.32,45.7 v52.35,46.67 | v92.17,31.23 92.93,31.23 Q2.1 | v24.58,52.77 23.96,52.77 20.57,56.16 20.57,56.85 U2.18
  Bottom 0.15: v91,31.16 92.1,31.16 v92.17,31.23 | v24.58,52.77 46.26,52.77 v52.35,46.67
EPD_BUSY  (via drill 0.3)
  Top 0.15: v85.45,16.27 85.52,16.34 86.63,16.34 86.98,16 86.98,15.1 J1.9 | v54.71,32.89 54.57,33.03 53.39,33.03 EPD_BUSY_TP9.TP 53.32,33.03 52.63,33.03 39.74,45.92 v39.3,45.92 | U2.26 10.97,56.28 10.97,55.3 17.4,48.87 20.86,48.87 22.26,50.26 27.09,50.26 v27.21,50.14
  Bottom 0.15: v54.71,32.89 65.37,22.23 75.21,22.23 81.08,16.36 85.37,16.36 v85.45,16.27 | v27.21,50.14 35.09,50.14 v39.3,45.92
EPD_CS  (via drill 0.3)
  Top 0.15: 57.27,13.43 84.55,13.43 85.45,14.34 85.45,15.03 J1.12 | 57.27,13.43 56.02,12.19 55.68,12.19 D6.2 | 57.27,13.43 57.27,13.5 55.61,15.17 55.61,18.35 R9.1 55.54,18.35 55.19,18.35 v54.78,18.77 | v23.48,37.33 21.88,37.33 20.57,38.64 20.57,39.33 U2.11 | v79.98,71.05 85.11,76.17 85.11,104.08 EPD_CS_TP10.TP | v54.71,45.77 v69.8,60.87
  Bottom 0.15: v23.48,37.33 36.22,37.33 41.79,31.75 | v54.78,18.77 41.79,31.75 | v69.8,60.87 v79.98,71.05 | 41.79,31.75 45.72,31.75 v54.71,45.77
EPD_DC  (via drill 0.3)
  Top 0.15: v54.71,29.09 54.57,29.22 53.39,29.22 EPD_DC_TP11.TP 53.32,29.22 52.08,29.22 v44.8,36.49 | v18.77,37.81 13.78,37.81 12.95,38.64 12.95,39.33 U2.5 | v85.94,13.64 85.94,15.01 J1.11
  Bottom 0.15: v18.77,37.81 43.49,37.81 v44.8,36.49 | v85.94,13.64 85.79,13.79 70,13.79 v54.71,29.09
EPD_RST  (via drill 0.3)
  Top 0.15: v86.49,15.86 86.49,15.1 J1.10 | v54.57,36.22 54.02,36.77 53.39,36.77 EPD_RST_TP12.TP 53.32,36.84 44.25,45.91 44.25,46.6 v44.04,46.81 | U2.21 16.76,56.85 16.76,56.16 22.23,50.69 v26.73,50.69
  Bottom 0.15: v86.49,15.86 66.13,36.22 v54.57,36.22 | v26.73,50.69 26.8,50.62 34.99,50.62 38.8,46.81 v44.04,46.81
FLASH_CS  (via drill 0.3)
  Top 0.15: D9.2 52.08,18.35 R5.1 52.01,18.42 51.52,18.42 v28.81,41.13 | v34.28,49.38 35.04,50.14 37.95,50.14 U5.1 | v22.23,40.51 21.81,40.1 21.81,39.4 U2.12
  Bottom 0.15: v34.28,49.38 32.96,49.38 26.77,43.18 | 26.77,43.18 24.1,40.51 v22.23,40.51 | 26.77,43.18 v28.81,41.13
GDR
  Top 0.15: J1.2 90.44,15.1 90.44,15.35 91.78,16.69 127.39,16.69 128.65,17.95 133.11,17.95 133.17,18 133.17,18.84 132.89,19.11 132.75,19.11 132.34,19.53 132.34,19.67 Q3.1 132.27,19.67 131.64,19.67 130.95,20.36 127.7,20.36 R4.1
GND  (via drill 0.3, 0.35)
  Top 0.15: U2.29_5 13.57,46.67 13.57,47.85 U2.29_6
  other vias: 43.31,104.65 43.43,96.52 77.09,22.23 78.74,41.91 83.43,15.93 20.95,85.72 16.64,45.34 7.75,33.53 154.94,11.43 161.54,61.21 161.54,58.42 156.84,11.05 17.02,40.89 6.35,93.98
  pour Top: 6.41,39.33 6.39,39.31 6.36,39.3 0.07,39.3 0.07,0.07 75.87,0.07 75.87,10.05 75.88,10.08 75.9,10.1 75.93,10.11 94.25,10.11 94.28,10.1 94.3,10.08 94.31,10.05 94.31,0.07 170.1,0.07 170.1,67.11 92.19,67.11 92.16,67.12 92.14,67.14 92.13,67.17 92.13,111.05 68.66,111.05 68.66,109.97 68.64,109.94 68.62,109.92 68.59,109.91 20.05,109.91 20.02,109.92 20,109.94 19.99,109.97 19.99,111.18 0.07,111.18 0.07,57.23 6.36,57.23 6.39,57.21 6.41,57.19 6.42,57.16 6.42,39.36
  pour Bottom: 6.41,39.33 6.39,39.31 6.36,39.3 0.07,39.3 0.07,0.07 75.87,0.07 75.87,10.05 75.88,10.08 75.9,10.1 75.93,10.11 94.25,10.11 94.28,10.1 94.3,10.08 94.31,10.05 94.31,0.07 170.1,0.07 170.1,67.11 92.19,67.11 92.16,67.12 92.14,67.14 92.13,67.17 92.13,111.05 68.66,111.05 68.66,109.97 68.64,109.94 68.62,109.92 68.59,109.91 20.05,109.91 20.02,109.92 20,109.94 19.99,109.97 19.99,111.18 0.07,111.18 0.07,57.23 6.36,57.23 6.39,57.21 6.41,57.19 6.42,57.16 6.42,39.36
GPIO8
  Top 0.15: R1.2 16.55,34.97 16.55,35.25 18.63,37.33 18.91,37.33 19.25,37.67 19.25,39.33 U2.10
I2C_PW  (via drill 0.3)
  Top 0.15: C1.1 154.98,5.75 156.16,5.75 C2.1 156.23,5.68 157.41,5.68 R1-PINH.2 157.54,5.75 158.72,5.75 R2-PINH.2 158.79,5.75 159.28,5.75 159.55,6.03 159.55,7.62 157.89,9.28 157.89,9.9 SENSOR2.6 157.82,9.97 157.82,10.8 156.75,11.88 | 156.3,11.43 156.3,9.97 SENSOR2.8 | 156.75,11.88 157.06,12.19 157.06,12.88 SENSOR2.2 | 156.75,11.88 156.3,11.43 | v58.86,52.49 36.77,52.49 33.45,49.17 29.29,49.17 21.81,56.65 21.81,56.85 U2.17 | v156.16,11.49 156.23,11.43 156.3,11.43
  Bottom 0.15: v58.86,52.49 115.16,52.49 v156.16,11.49
INT_RTC  (via drill 0.3)
  Top 0.15: 77.7,63.36 77.7,65.37 R1-PINH1.1 77.63,65.37 77.35,65.37 v76.87,65.86 | 77.7,63.36 78.05,63.02 78.05,61.84 U3.3 | v17.31,38.3 17.11,38.3 16.76,38.64 16.76,39.33 U2.8 | v57.89,49.58 71.67,63.36 77.7,63.36 | v76.73,67.17 76.17,67.73 76.17,104.08 INT_RTC_TP15.TP
  Bottom 0.15: v17.31,38.3 46.6,38.3 v57.89,49.58 | v76.73,67.17 76.73,66 v76.87,65.86
IO/BOOT  (via drill 0.3)
  Top 0.15: C6.1 27.91,108.24 27.35,108.24 26.38,109.21 25.76,109.21 BOOT_BUTTON.3 25.69,109.21 25.14,109.21 24.38,108.44 24.38,108.03 24.17,107.82 23.82,107.82 23.41,108.24 23.41,108.72 22.92,109.21 22.3,109.21 BOOT_BUTTON.4 22.23,109.21 21.61,109.21 20.29,107.89 | 20.29,107.89 19.46,107.89 R_BOOT.2 | v24.31,84.14 24.31,56.92 U2.15 | v20.36,107.75 20.29,107.82 20.29,107.89
  Bottom 0.15: v24.31,84.14 24.31,103.81 v20.36,107.75
IO/CHANGE  (via drill 0.3)
  Top 0.15: C10.1 69.53,108.24 67.38,108.24 66.41,109.21 65.79,109.21 CHANGE_BUTTON.3 65.72,109.21 65.09,109.21 64.4,108.52 64.4,108.1 64.13,107.82 63.85,107.82 63.43,108.24 63.43,108.65 62.88,109.21 62.26,109.21 CHANGE_BUTTON.4 62.19,109.21 61.63,109.21 60.66,108.24 59.76,108.24 | 59.76,108.24 58.93,108.24 R_CHANGE.2 | v23.82,72.16 14.13,62.46 14.13,56.92 U2.23 | v59.76,108.1 59.76,108.24
  Bottom 0.15: v59.76,108.1 v23.82,72.16
MISO  (via drill 0.3)
  Top 0.15: v9.56,55.75 9.14,56.16 9.14,56.85 U2.27 9.07,56.92 9.07,57.62 4.99,61.7 4.99,63.78 11.43,70.22 11.43,73.61 MISO_TP6.TP | R8.1 26.04,93.28 26.04,88.16 25.41,87.53 25.41,87.12 D12.2 25.35,87.05 24.79,87.05 12.05,74.31 11.49,74.31 MISO_TP6.TP | MISO_TP6.TP 11.43,73.68 11.43,74.93 3.4,82.96 3.4,92.17 4.04,93.58 4.29,93.83 J4.P7 | U5.2 37.71,48.59 17.29,48.59 11.45,54.43 v10.87,54.43
  Bottom 0.15: v10.87,54.43 v9.56,55.75
MOSI  (via drill 0.3)
  Top 0.15: J1.14 84.48,15.03 84.48,14.4 84.21,14.13 79.36,14.13 72.09,21.4 72.09,22.78 48.54,46.33 45.84,46.33 U5.5 45.77,46.33 v44.74,46.33 | D11.2 29.22,87.12 29.22,93.28 R7.1 29.15,93.35 29.02,93.49 27.15,93.49 26.59,94.04 25.48,94.04 25.41,93.97 25.35,93.97 23.6,92.23 14.72,92.23 11.82,89.33 6.92,89.33 | v15.44,40.86 15.44,39.4 U2.7 | v7.13,66.55 6.16,67.52 MOSI_TP7.TP | v6.92,89.26 6.92,89.33 | 6.92,89.33 5.09,89.33 J4.P3
  Bottom 0.15: v6.92,89.26 6.92,88.09 6.86,88.02 6.86,66.89 7.13,66.62 v7.13,66.55 7.13,55.65 15.44,47.34 v15.44,40.86 15.51,40.86 16.34,40.03 28.32,40.03 33.41,45.12 39.1,45.12 40.31,46.33 v44.74,46.33
N$1  (via drill 0.3)
  Top 0.15: 120.32,47.33 120.08,47.58 119.66,47.58 IC4.1 | 120.32,47.33 121.29,46.36 | 121.29,46.36 123.13,44.53 123.68,44.53 C1_BAT1.1 | 120.32,47.33 120.56,47.58 120.56,49.03 120.15,49.44 119.66,49.44 IC4.3 | 121.29,46.36 124.17,49.24 126.73,49.24 Q1.2 126.66,49.31 126.66,49.58 v127.07,50 | v128.18,49.31 129.5,49.31 D2.1
  Bottom 0.15: v128.18,49.31 127.77,49.31 v127.07,50
N$2  (via drill 0.3)
  Top 0.15: v162.39,55.54 158.1,59.83 157.54,59.83 R2-USB1.2 | v165.3,53.05 164.4,53.05 J2.A5
  Bottom 0.15: v162.39,55.54 162.81,55.54 v165.3,53.05
N$3  (via drill 0.3)
  Top 0.15: R5.2 52.08,19.74 55.61,19.74 R9.2 55.33,19.8 v55.33,38.92 | R8.2 26.04,94.67 29.15,94.67 R7.2 29.22,94.67 32.83,94.67 R6.2 32.89,94.6 32.96,94.53 34.06,95.12 35.14,95.12 35.73,94.53 | 35.73,94.53 36.63,94.53 R10.2 | v58.38,56.02 58.38,62.19 35.73,84.83 34.29,86.36 34.29,93.08 35.73,94.53
  Bottom 0.15: v55.33,38.92 55.33,46.4 58.38,49.44 v58.38,56.02
N$5
  Top 0.15: R1_BAT.1 139.05,52.01 139.05,49.93 139.61,49.38 139.61,49.24 U1.1
N$6
  Top 0.15: D3.2 139.68,19.8 139.68,17.17 C4.1 139.75,17.11 139.82,17.04 140.3,17.04 140.51,16.83 140.51,15.03 135.66,10.18 135.11,10.18 D4.1
N$7
  Top 0.15: CHG_LED.C 142.72,52.08 140.37,52.08 R1_BAT.2
N$8
  Top 0.15: R_CAPACITOR.1 84.48,48.27 87.81,48.27 D7.1
N$9
  Top 0.15: R2-USB.1 159.28,59.97 161.98,59.97 163.91,58.03 164.88,58.03 164.95,58.1 165.58,58.1 166.2,57.48 166.2,56.92 165.3,56.02 164.4,56.02 J2.B5
N$10
  Top 0.15: IC1.5 47.16,100 48.75,100 49.1,99.65 49.51,99.65 C_DELAY.1
N$11  (via drill 0.3)
  Top 0.15: v74.44,19.67 79.01,15.1 79.43,15.1 J1.24 | v64.33,20.57 63.92,20.98 63.5,20.98 EPD_C12.1
  Bottom 0.15: v74.44,19.67 65.23,19.67 v64.33,20.57
N$12  (via drill 0.3)
  Top 0.15: v144.53,48.96 146.05,48.96 R2_BAT.2 | v143.28,49.24 142.31,49.24 U1.5
  Bottom 0.15: v144.53,48.96 143.56,48.96 v143.28,49.24
N$13
  Top 0.15: J1.20 81.44,15.1 81.44,20.77 81.3,20.91 EPD_C8.1
N$14  (via drill 0.3)
  Top 0.15: v75.76,20.43 80.47,15.72 80.47,15.1 J1.22 | v71.95,20.64 71.74,20.84 71.26,20.84 71.19,20.91 EPD_C10.1
  Bottom 0.15: v75.76,20.43 72.16,20.43 v71.95,20.64
N$15
  Top 0.15: J1.19 81.99,15.1 81.99,17.52 85.11,20.64 85.11,20.91 EPD_C7.1
N$16
  Top 0.15: J1.18 82.48,15.1 82.48,16.03 87.22,20.77 88.71,20.77 88.85,20.91 EPD_C6.1
N$17
  Top 0.15: J1.4 89.47,15.1 89.47,15.72 93.97,20.22 101.66,20.22 102.28,20.84 102.77,20.84 102.84,20.91 EPD_C1.1
N$18
  Top 0.15: J1.5 88.99,15.1 88.99,15.72 94.04,20.77 97.64,20.77 97.78,20.91 EPD_C2.1
PREVGH  (via drill 0.3)
  Top 0.15: J1.21 80.95,15.1 v80.95,15.86 75.9,20.91 75,20.91 EPD_C9.1 | v96.88,15.23 131.57,15.23 D5.1
  Bottom 0.15: v96.88,15.23 95.99,14.35 82.47,14.35 v80.95,15.86
PREVGL  (via drill 0.3)
  Top 0.15: v68.14,20.64 67.93,20.84 67.38,20.84 67.31,20.91 EPD_C11.1 | v107.13,10.18 131.57,10.18 D4.2 | J1.23 79.82,15.19 79.82,15.52 79.7,15.64 79.09,15.64 v75.07,19.67
  Bottom 0.15: v68.14,20.64 68.63,20.15 74.58,20.15 v75.07,19.67 75.14,19.67 80.73,14.07 97.42,14.07 101.31,10.18 v107.13,10.18
RESE
  Top 0.15: J1.3 89.96,15.1 89.96,15.65 91.27,16.97 127.07,16.97 127.83,17.73 127.83,18.14 R3.1 127.83,18.21 128.04,18.42 132.27,18.42 Q3.2
RESE'  (via drill 0.3)
  Top 0.15: SJ1.2 106.16,10.18 106.09,10.25 106.09,13.92 R2.2 106.16,13.78 v106.78,14.4 | v109.83,17.45 110.52,18.14 126.45,18.14 R3.2
  Bottom 0.15: v106.78,14.4 v109.83,17.45
RESET  (via drill 0.3)
  Top 0.15: R_RESET.2 53.53,108.65 51.94,108.65 51.38,109.21 50.76,109.21 RESET_BUTTON.3 50.69,109.21 50.14,109.21 49.38,108.44 49.38,108.03 49.17,107.82 48.82,107.82 48.48,108.17 48.48,108.65 47.92,109.21 47.3,109.21 RESET_BUTTON.4 47.23,109.28 45.57,109.28 44.46,108.17 44.39,108.17 | 44.39,108.17 44.39,106.78 44.32,106.71 IC1.1 44.25,100 44.18,99.93 43.7,99.93 v43.49,99.72 | 44.39,108.17 44.04,108.52 43.56,108.52 43.49,108.58 C5.1 | v10.32,55.75 10.32,39.43 U2.3
  Bottom 0.15: v10.32,55.75 10.32,66.55 v43.49,99.72
RTC_RST  (via drill 0.3)
  Top 0.15: v23.82,58.38 23.06,57.62 23.06,56.92 U2.16 | v75.9,60.39 76.8,61.29 76.8,61.77 U3.4
  Bottom 0.15: v23.82,58.38 64.13,58.38 66.13,60.39 v75.9,60.39
RX
  Top 0.15: U2.24 12.88,56.92 12.88,64.61 11.43,66.06 11.43,67.24 RX_TP2.TP
SCK  (via drill 0.3)
  Top 0.15: R6.1 32.89,93.28 32.89,87.19 32.96,87.12 D10.2 32.83,87.19 32.41,87.19 29.85,84.62 | 6.92,92.17 6.92,95.29 6.72,95.5 4.18,95.5 3.76,95.08 3.76,93.64 3.18,92.38 3.12,92.31 3.12,78.11 6.09,75.14 6.09,73.96 SCK_TP8.TP | 6.92,92.17 6.92,91.83 6.73,91.63 J4.P5 | v22.99,84.62 29.85,84.62 | v6.79,92.17 6.92,92.17 | v72.57,22.71 47.64,47.64 45.84,47.64 U5.6 45.77,47.64 45.08,47.64 v44.94,47.78 | J1.13 84.97,15.1 84.97,16.55 84.76,16.76 v84.76,16.79 | U2.6 14.2,39.4 14.2,40.22 22.29,48.31 37.83,48.31 37.85,48.34 v38.78,48.34 | 29.85,84.62 29.85,57.34 v34.9,52.28
  Bottom 0.15: v22.99,84.62 14.34,84.62 v6.79,92.17 | v72.57,22.71 75.14,22.71 81.06,16.79 v84.76,16.79 | v44.94,47.78 44.39,48.34 v38.78,48.34 38.78,48.41 v34.9,52.28
SCL  (via drill 0.3)
  Top 0.15: 158.48,13.75 158.65,13.57 158.65,12.95 SENSOR2.4 | 158.48,13.75 158.31,13.92 154.61,13.92 154.27,13.57 154.27,9.49 154.75,9 157.06,9 158.72,7.34 158.72,7.06 R2-PINH.1 | v164.05,20.29 164.54,20.77 165.3,20.77 J3.4 | 158.48,13.75 v158.58,13.85 | v124.86,58.66 125.07,58.86 126.66,58.86 126.8,58.72 126.8,58.17 U4.7 | v81.3,53.12 80.68,52.49 U3.16 80.88,52.77 80.12,53.53 v80.47,53.88 | v19.04,55.75 18.42,55.75 18,56.16 18,56.85 U2.20
  Bottom 0.15: v158.58,13.85 164.05,19.32 v164.05,20.29 163.71,20.29 125.34,58.66 v124.86,58.66 119.32,53.12 v81.3,53.12 | v19.04,55.75 19.18,55.75 20.22,56.78 77.56,56.78 v80.47,53.88
SDA  (via drill 0.3)
  Top 0.15: 158.58,14.34 158.72,14.34 159.28,13.78 159.28,12.26 159.07,12.05 158.03,12.05 157.89,12.19 SENSOR2.3 | 158.58,14.34 154.61,14.34 153.99,13.71 153.99,9.35 154.61,8.73 156.02,8.73 157.47,7.27 157.47,7.06 R1-PINH.1 | v163.5,19.39 163.91,19.8 165.3,19.8 J3.3 | v158.58,14.47 158.58,14.34 | v123.75,58.17 125.76,58.17 | 125.76,58.17 126.24,58.17 U4.8 | v80.47,54.5 79.43,53.46 79.43,52.56 U3.15 | v19.88,55.82 19.6,55.82 19.25,56.16 19.25,56.85 U2.19 | 125.76,58.17 v125.76,57.62
  Bottom 0.15: v158.58,14.47 v163.5,19.39 163.5,19.88 v125.76,57.62 | v123.75,58.17 84.14,58.17 v80.47,54.5 80.54,54.5 80.95,54.08 80.95,53.74 80.61,53.39 80.33,53.39 77.21,56.51 20.57,56.51 v19.88,55.82
SRC
  Top 0.15: 136.28,15.86 139.68,15.86 C4.2 | 136.28,15.86 135.66,15.23 135.11,15.23 D5.2 | 136.28,15.86 136.28,15.93 134.41,17.8 134.41,19.04 Q3.3 134.41,19.11 134.41,20.77 L1.1
SS_SD  (via drill 0.3)
  Top 0.15: D8.2 36.7,87.05 36.7,93.14 R10.1 36.77,93.14 37.12,93.14 37.53,93.56 v37.53,94.39 | U2.4 11,40.02 11,40.23 10.8,40.43 v10.8,53.85 | v7.34,87.88 6.89,88.33 J4.P2
  Bottom 0.15: 7.62,83.65 7.62,87.6 v7.34,87.88 | 7.62,83.65 7.62,57.06 10.8,53.88 v10.8,53.85 | v37.53,94.39 35.18,94.39 24.45,83.65 7.62,83.65
TX
  Top 0.15: TX_TP1.TP 6.35,60.73 9.23,57.85 10.88,57.85 11,57.73 11,57.52 U2.25
USB_D+  (via drill 0.3)
  Top 0.15: v144.66,59.35 152.42,59.35 D1.1 | v64.61,57.62 57.76,50.76 v57.06,50.76 | v25.14,39.54 24.52,39.54 24.38,39.4 U2.14
  Bottom 0.15: v144.66,59.35 66.34,59.35 v64.61,57.62 | v57.06,50.76 45.84,39.54 v25.14,39.54
USB_D-  (via drill 0.3)
  Top 0.15: v145.77,58.86 147.16,57.48 D1.3 | v40.86,57.62 32.89,49.65 v32.62,49.65 | v23.96,41 23.06,40.1 U2.13
  Bottom 0.15: v145.77,58.86 144.8,59.83 66,59.83 63.78,57.62 v40.86,57.62 | v23.96,41 v32.62,49.65
VBAT
  Top 0.15: U4.3 127.21,56.16 126.8,56.16 U4.2 126.73,56.02 126.73,55.75 126.66,55.68 126.66,55.47
  Top 0.3: 127.63,48.27 134.62,48.27 135.25,47.64 135.87,47.64 C2_BAT.1 136.01,47.58 136.49,47.58 136.77,47.3 139.61,47.3 U1.3 | 127.63,48.27 124.65,48.27 Q1.3 | 126.76,55.37 127.63,54.5 127.63,48.27 | 126.76,55.37 126.66,55.47 | VBAT_TP3.TP 116.89,63.43 117.72,63.43 125.97,55.19 126.59,55.19 126.76,55.37
VBUS
  Top 0.3: D1.5 154.98,58.38 155.81,58.38 157.89,56.3 157.89,54.85 C5_USB.1 158.03,54.71 158.03,53.53 C4_USB.1 157.89,53.39 157.47,53.39 155.26,51.18 155.26,50.83 PFMF.050.1.2 155.12,51.04 144.25,51.04 | R1_PWRUSB.2 126.73,44.53 126.73,47.3 Q1.1 126.87,47.23 129.5,47.23 D2.2 129.64,47.23 134.9,47.23 135.52,46.6 141.55,46.6 141.69,46.54 | 144.25,51.04 144.25,49.44 142.52,47.71 142.52,47.44 142.45,47.37 142.31,47.37 U1.4 142.17,47.3 142.03,47.16 142.03,46.88 141.69,46.54 | 144.25,51.04 144.25,52.01 CHG_LED.A 144.25,52.22 144.11,52.35 144.11,62.12 142.31,63.92 142.31,64.75 VBUS_TP14.TP | 141.69,46.54 141.69,44.46 C1_BAT.1
VRTC
  Top 0.15: C8.1 76.24,47.64 78.32,47.64 78.74,48.06 C10_SUPERCAP.1 | 78.94,48.27 R_CAPACITOR.2 | 78.94,48.27 78.81,48.13 C10_SUPERCAP.1 | 78.94,48.27 78.11,49.1 U3.14 | 78.94,48.27 C10_SUPERCAP.1
VUSB
  Top 0.3: J2.A9 164.33,56.78 164.33,56.58 J2.B4 164.19,56.65 163.5,56.65 162.94,56.09 162.94,51.94 | J2.A4 164.33,51.8 164.33,52.01 J2.B9 164.19,51.94 162.94,51.94 | 162.94,51.94 161.08,51.94 159.97,50.83 159.76,50.83 PFMF.050.1.1